# EAGLE board Ion_Pump_Controler_6A (EAGLE 4.11)
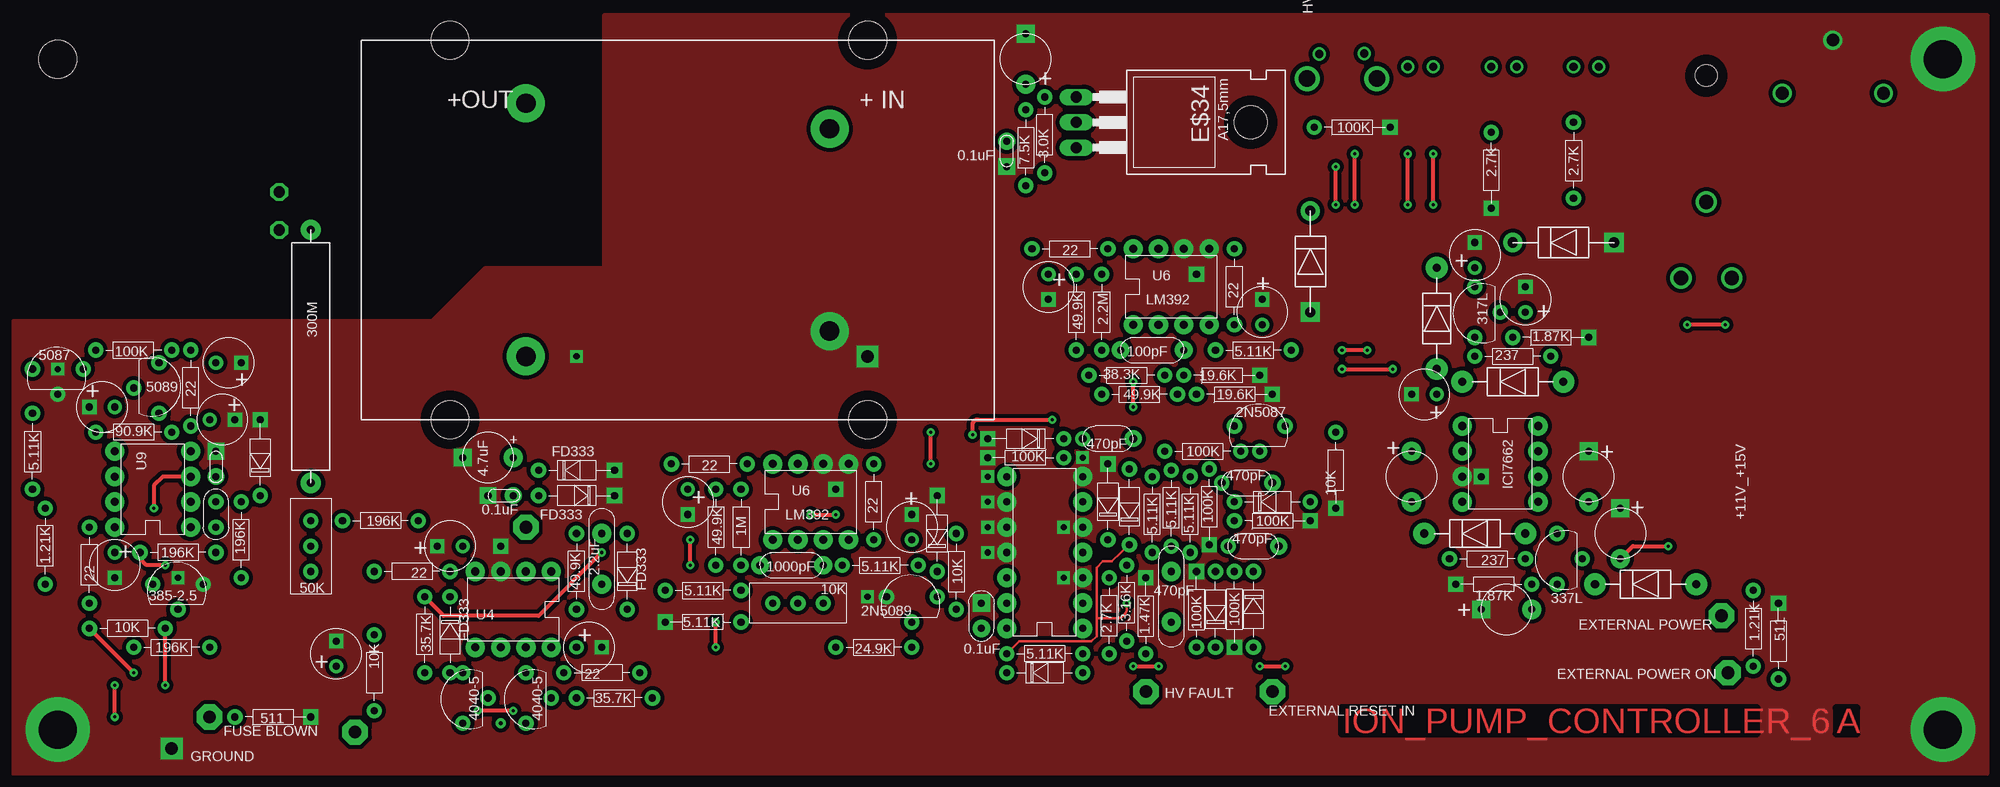
[diagram p0: board, top side]
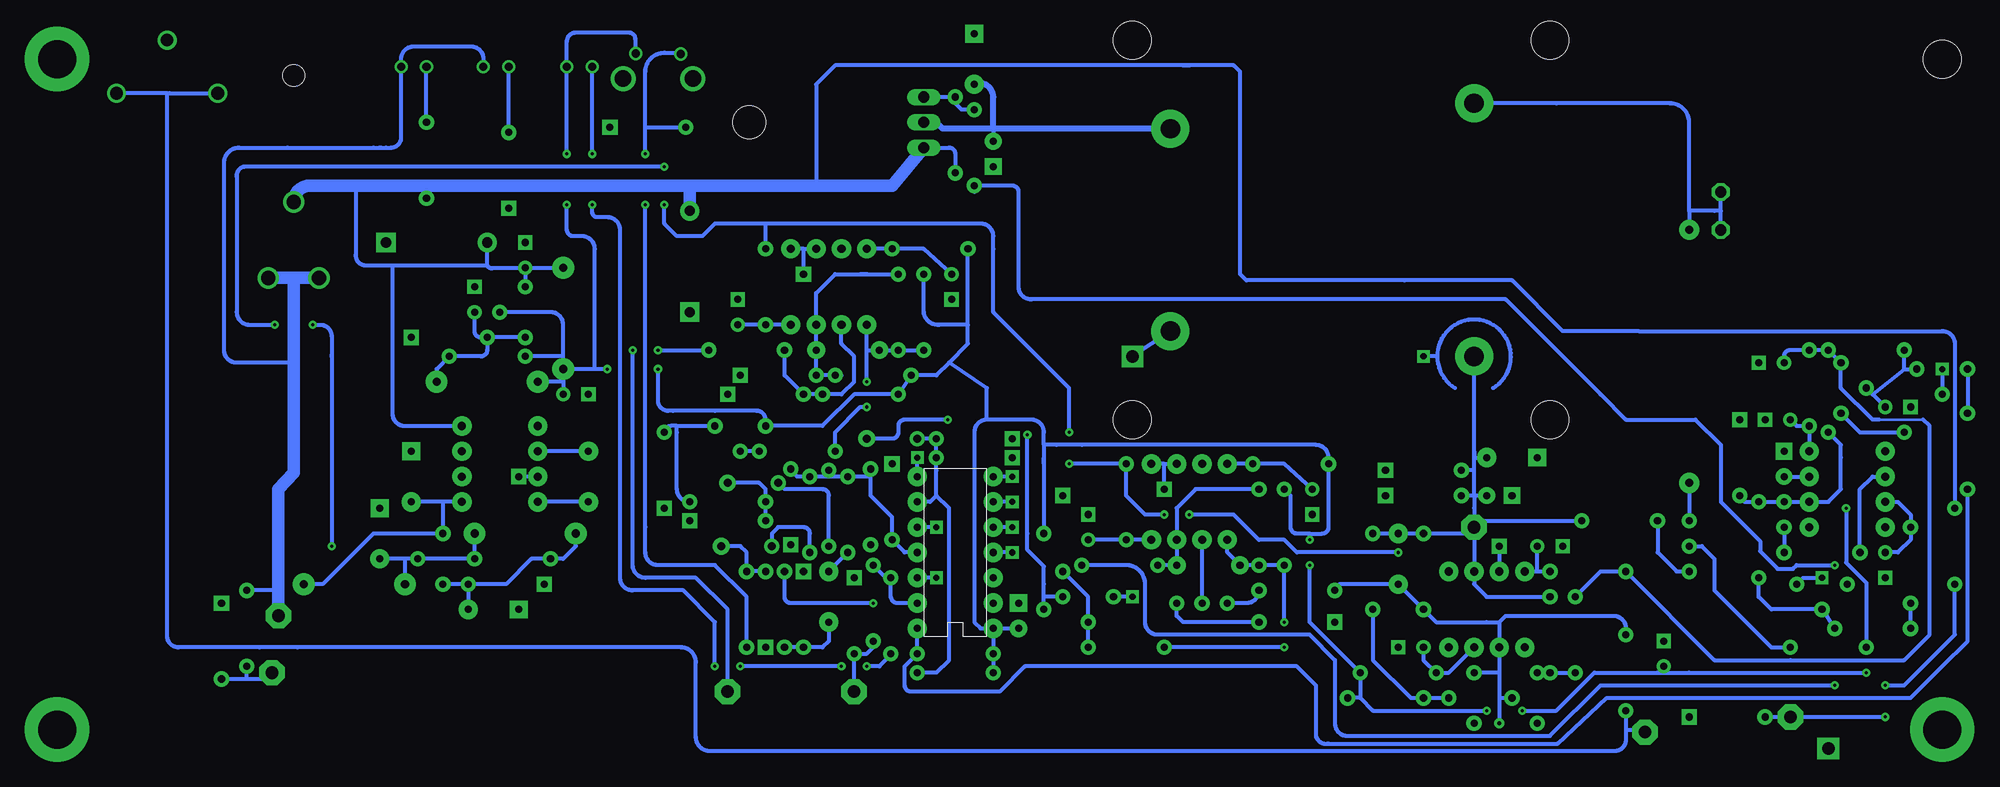
[diagram p1: board, bottom side, seen from below]

No outline drawn. Coordinates in mm, seen from the top.
Copper layers (1*16): Top 0.035mm / dielectric 1.5mm / Bottom 0.035mm
Design rules "default": minimum track width 10mil, minimum drill 24mil, track to track 8mil, track to pad 8mil, pad to pad 8mil, via to via 8mil, smd to smd 8mil, copper to edge 40mil, drill to drill 8mil, minimum pad ring 10mil, minimum via ring 8mil, stop-mask expansion 4mil, vias tented up to drill 0mil, thermal gap 10mil
Holes 3.81 mm at 4.45,-4.45 85.72,-2.54 85.72,-40.64 43.81,-2.54 43.81,-40.64

## Footprints (pad centres in the part's own frame; a part is rotated, then mirrored left to right if it is on the bottom)
E_PAD = drill 1.93 pad 3.81 round: P$1 0,0
PADOC100 = drill 1.27 pad 2.54 octagon: P$1 0,0
PADOCT70 = drill 1.143 pad 1.778 octagon: P$1 0,0
TPOT = drill 0.711 pad 1.524 round: P$2 0,0; P$3 0,2.54; P$4 0,5.08
D3AG = drill 0.711 pad 1.524 round: P$1 0,0 | drill 0.711 pad 1.524 square: P$2 7.62,0
D3KG = drill 0.711 pad 1.524 round: P$1 0,0 | drill 0.711 pad 1.524 square: P$2 7.62,0
TANT2GND = drill 0.711 pad 1.778 square: P$1 0,5.08 | drill 0.711 pad 1.93 round: P$3 0,0
CAP1_GND = drill 0.711 pad 1.676 square: P$1 0,0 | drill 0.711 pad 1.676 round: P$2 2.54,0
GND_L = drill 1.27 pad 2.184 square: P$1 0,0
DIP8 = drill 0.813 pad 1.93 round: P$1 0,0; P$2 2.54,0; P$3 5.08,0; P$4 7.62,0; P$5 7.62,7.62; P$6 5.08,7.62; P$7 2.54,7.62; P$8 0,7.62
R_HV = drill 0.813 pad 2.032 round: P$1 0,0; P$2 25.4,0
R3 = drill 0.711 pad 1.524 round: P$1 0,0; P$2 7.62,0
TANT1GND = drill 0.711 pad 1.422 square: P$1 0,2.54 | drill 0.711 pad 1.422 round: P$2 0,0
CAPMICA2 = drill 0.711 pad 1.93 round: P$1 0,0; P$2 5.08,0
TO92 = drill 0.711 pad 1.524 round: P$1 0,0; P$3 0,5.08; P$4 -2.54,2.54
D3 = drill 0.711 pad 1.524 round: P$1 0,0; P$2 7.62,0
GND = drill 0.711 pad 1.524 square: P$1 0,0
GND_S = drill 0.61 pad 1.27 square: P$1 0,0
TO220 = drill 1.118 long: 1 -2.54,-6.35; 2 0,-6.35; 3 2.54,-6.35 | hole 3.302: 0,11.176
R3G = drill 0.711 pad 1.524 round: P$1 0,0 | drill 0.711 pad 1.524 square: P$2 7.62,0
CAP2-5 = drill 0.711 pad 1.778 round: P$1 0,0; P$2 6.35,0
DIP14 = drill 0.711 pad 1.93 round: P$1 0,0; P$2 2.54,0; P$3 5.08,0; P$4 7.62,0; P$5 7.62,7.62; P$6 5.08,7.62; P$7 2.54,7.62; P$8 0,7.62; P$9 10.16,7.62; P$10 12.7,7.62; P$12 15.24,0; P$13 12.7,0; P$14 10.16,0; P$16 15.24,7.62 | drill 0.406 pad 1.93 round: P$11 15.24,7.62; P$15 15.24,7.62
CAP_1GND = drill 0.711 pad 1.778 round: P$1 0,0 | drill 0.711 pad 1.778 square: P$2 0,2.54
CAP2 = drill 0.813 pad 1.676 round: P$1 0,0 | drill 0.813 pad 1.524 round: P$2 5.08,0
P_B_SWITCH = drill 0.813 round: P$1 2.286,2.54; P$2 -2.235,2.489 | drill 1.676 round: P$3 -3.505,5.004; P$4 3.505,5.004
LED_RTANGL = drill 0.813 round: P$1 -1.27,5.207; P$2 1.27,5.207
JACK = drill 1.27 round: P$1 0,0; P$2 5.08,-5.334; P$3 -5.08,-5.334
CAP1 = drill 0.711 pad 1.524 round: P$1 0,0; P$2 0,2.54
D4AG = drill 1.016 pad 1.93 round: P$1 10.16,0 | drill 1.016 pad 1.93 square: P$2 0,0
D4 = drill 0.813 pad 2.184 round: P$1 0,0; P$2 10.16,0
TANT2 = drill 0.711 pad 1.93 round: P$1 0,-2.54; P$2 0,2.54
PAD_#6 = drill 3.81 pad 6.452 round: P$1 0,0
FUSE_HOLDER_SHORT = drill 1.422 round: P$1 0,0; P$2 2.55,-7.62; P$3 -2.54,-7.63 | hole 2.184: 0,12.7

## Placement (x,y rotation side)
E$1  [E_50]  98.42,-2.54 180 top
E$2  [E_PAD]  81.92,-31.75 180 top
E$3  [E_PAD]  51.44,-34.29 180 top
E$4  [E_PAD]  51.44,-8.89 180 top
E$5  [E_PAD]  81.92,-11.43 180 top
E$6  [PADOC100]  34.29,-72.01 0 top
E$7  [PADOCT70]  26.67,-17.78 0 top
E$8  [PADOCT70]  26.67,-21.59 0 top
E$9  [PADOC100]  51.44,-51.44 0 top
E$10  [TPOT]  29.84,-55.88 0 top
E$11  [D3AG]  52.7,-45.72 0 top
E$12  [D3KG]  52.7,-48.26 0 top
E$13  [TANT2GND]  50.16,-44.45 90 top
E$14  [CAP1_GND]  47.62,-48.26 0 top
E$15  [GND_L]  85.72,-34.29 180 top
E$16  [DIP8]  53.98,-55.88 180 top
E$17  [R_HV]  29.84,-21.59 270 top
E$18  [R3]  12.06,-63.5 0 top
E$19  [R3]  40.64,-50.8 180 top
E$20  [R3]  43.81,-55.88 180 top
E$21  [R3]  62.87,-66.04 180 top
E$22  [TANT1GND]  56.52,-63.5 270 top
E$23  [TANT1GND]  45.09,-53.34 90 top
E$24  [R3]  56.52,-59.69 90 top
E$25  [CAPMICA2]  59.05,-57.15 90 top
E$26  [TO92]  45.09,-66.04 180 top
E$27  [TO92]  51.44,-66.04 180 top
E$28  [R3]  56.52,-68.58 0 top
E$29  [R3]  41.27,-66.04 90 top
E$30  [D3]  43.81,-58.42 270 top
E$31  [D3]  61.59,-59.69 90 top
E$32  [GND]  48.9,-53.34 90 top
E$33  [GND_S]  56.52,-34.29 0 top
E$34  [TO220]  113.03,-10.79 270 top
E$35  [R3]  103.5,-15.88 90 top
E$36  [R3]  101.6,-9.53 270 top
E$37  [R3]  36.2,-62.23 270 top
E$38  [TANT2GND]  101.6,-6.99 0 top
E$39  [R3]  70.48,-47.62 270 top
E$40  [R3]  73.03,-47.62 270 top
E$41  [TPOT]  81.28,-59.05 90 top
E$42  [R3G]  73.03,-60.96 180 top
E$43  [TO92]  92.71,-58.42 90 top
E$44  [R3]  82.55,-63.5 0 top
E$45  [GND_S]  85.72,-58.42 0 top
E$46  [CAP2-5]  74.93,-55.24 0 top
E$47  [CAP1_GND]  99.69,-15.24 90 top
E$48  [D3AG]  92.71,-55.88 90 top
E$49  [R3]  94.61,-52.07 270 top
E$50  [DIP14]  107.31,-61.59 90 top
E$51  [GND_S]  107.31,-44.45 180 top
E$52  [GND_S]  105.41,-56.52 180 top
E$53  [GND_S]  105.41,-51.44 180 top
E$54  [CAP_1GND]  97.16,-61.59 0 top
E$55  [R3]  107.31,-64.14 180 top
E$56  [DIP8]  76.2,-52.7 0 top
E$57  [R3]  109.98,-64.14 90 top
E$58  [R3]  111.76,-62.87 90 top
E$59  [R3G]  113.67,-64.14 90 top
E$60  [R3G]  105.41,-44.45 180 top
E$61  [D3]  99.69,-66.04 0 top
E$62  [D3AG]  105.41,-42.55 180 top
E$63  [R3]  86.36,-52.7 90 top
E$64  [R3]  66.04,-45.09 0 top
E$65  [R3]  65.41,-57.78 0 top
E$66  [CAP2]  112.39,-42.55 180 top
E$67  [GND]  82.55,-47.62 0 top
E$68  [TANT1GND]  90.17,-52.7 0 top
E$69  [TANT1GND]  67.69,-47.62 180 top
E$70  [R3]  83.19,-55.24 0 top
E$71  [D3AG]  109.86,-52.7 90 top
E$72  [D3]  112.01,-53.21 90 top
E$73  [R3]  114.3,-53.98 90 top
E$74  [R3]  116.2,-53.34 90 top
E$75  [R3]  118.11,-53.98 90 top
E$76  [R3G]  120.02,-45.59 270 top
E$77  [CAPMICA2]  116.2,-55.88 270 top
E$78  [R3G]  118.75,-63.5 90 top
E$79  [D3]  120.65,-63.5 90 top
E$80  [CAP2]  127,-53.34 180 top
E$81  [CAP2]  126.36,-46.99 180 top
E$82  [R3G]  122.56,-55.88 270 top
E$83  [GND_S]  97.79,-46.35 0 top
E$84  [D3]  124.46,-55.88 270 top
E$85  [R3G]  122.56,-50.8 0 top
E$86  [D3]  122.56,-48.9 0 top
E$87  [GND_S]  97.79,-48.9 0 top
E$88  [GND_S]  97.79,-51.44 0 top
E$89  [GND_S]  97.79,-53.98 0 top
E$90  [DIP8]  112.39,-31.11 0 top
E$91  [R3]  122.56,-31.11 90 top
E$92  [R3]  102.23,-23.5 0 top
E$93  [TANT1GND]  125.35,-31.11 0 top
E$94  [GND]  118.75,-26.04 0 top
E$95  [TANT1GND]  103.89,-26.04 180 top
E$96  [R3]  120.65,-33.66 0 top
E$97  [CAP2-5]  111.12,-33.66 0 top
E$98  [R3]  106.68,-26.04 270 top
E$99  [R3]  109.22,-26.04 270 top
E$100  [R3]  107.95,-36.2 0 top
E$101  [R3G]  117.47,-36.2 0 top
E$102  [R3G]  118.75,-38.1 0 top
E$103  [R3]  109.22,-38.1 0 top
E$104  [TO92]  127.64,-41.27 90 top
E$105  [R3]  115.57,-43.81 0 top
E$106  [R3G]  132.72,-41.91 270 top
E$107  [P_B_SWITCH]  133.35,-1.4 180 top
E$108  [LED_RTANGL]  141.22,0 180 top
E$109  [LED_RTANGL]  149.61,0 180 top
E$110  [LED_RTANGL]  157.86,0 180 top
E$112  [JACK]  182.63,-2.54 0 top
E$113  [R3]  156.59,-10.79 270 top
E$114  [R3G]  148.34,-11.81 270 top
E$115  [R3G]  130.56,-11.3 0 top
E$116  [TO92]  146.69,-27.3 180 top
E$117  [TO92]  154.94,-52.07 180 top
E$118  [DIP8]  145.41,-41.27 270 top
E$119  [TANT1GND]  146.69,-25.4 0 top
E$120  [TANT1GND]  151.76,-29.84 0 top
E$121  [TANT1GND]  142.88,-38.1 90 top
E$122  [DIP8]  17.78,-51.44 90 top
E$123  [R3]  20.32,-53.98 180 top
E$124  [R3]  7.62,-59.05 90 top
E$125  [R3]  17.78,-41.27 90 top
E$126  [TANT1GND]  10.16,-53.98 180 top
E$127  [TANT1GND]  19.68,-40.64 270 top
E$128  [CAP1]  20.32,-48.9 180 top
E$129  [CAP1_GND]  20.32,-43.81 270 top
E$130  [R3]  15.24,-61.59 180 top
E$131  [R3]  22.86,-56.52 90 top
E$132  [TO92]  19.05,-57.15 90 top
E$133  [GND_S]  16.51,-56.52 180 top
E$134  [TO92]  14.61,-40.01 0 top
E$135  [R3]  8.26,-33.66 0 top
E$136  [R3]  15.88,-41.91 180 top
E$137  [D3AG]  24.77,-48.26 90 top
E$138  [TANT1GND]  10.16,-39.37 90 top
E$139  [TO92]  6.99,-35.56 90 top
E$140  [GND_S]  4.45,-35.56 180 top
E$141  [R3]  1.91,-40.01 270 top
E$142  [R3]  146.69,-34.29 0 top
E$143  [R3G]  150.5,-32.38 0 top
E$144  [D4AG]  160.66,-22.86 180 top
E$145  [D4]  142.88,-25.4 270 top
E$146  [D4]  145.41,-36.83 0 top
E$147  [GND]  147.32,-46.35 0 top
E$148  [TANT2]  140.34,-46.35 0 top
E$149  [TANT2GND]  158.12,-48.9 0 top
E$150  [R3]  144.15,-54.61 0 top
E$151  [R3G]  152.4,-57.15 180 top
E$152  [TANT2GND]  161.29,-54.61 0 top
E$153  [TANT2GND]  152.4,-59.69 90 top
E$154  [D4]  141.6,-52.07 0 top
E$155  [D4]  158.75,-57.15 0 top
E$156  [D4AG]  130.18,-29.84 90 top
E$157  [TANT1GND]  32.38,-65.41 0 top
E$158  [PADOC100]  126.36,-67.94 0 top
E$159  [TANT1GND]  20.32,-34.92 270 top
E$160  [R3]  3.17,-57.15 90 top
E$161  [R3]  174.62,-57.78 270 top
E$162  [R3G]  177.16,-66.67 90 top
E$163  [PADOC100]  172.09,-66.04 0 top
E$164  [PAD_#6]  193.68,-4.45 0 top
E$165  [PAD_#6]  193.68,-71.75 0 top
E$166  [PADOC100]  19.68,-70.48 0 top
E$167  [GND_L]  15.88,-73.66 0 top
E$168  [R3G]  22.23,-70.48 0 top
E$169  [PADOC100]  171.45,-60.33 0 top
E$170  [PADOC100]  113.67,-67.94 0 top
E$171  [PAD_#6]  4.45,-71.75 0 top
E$172  [FUSE_HOLDER_SHORT]  169.93,-18.8 0 top

## Library data of the parts
E$1-E$33 E$35-E$110 E$112-E$172 = AJ1
E$34 = transistor

## Nets
2.5R: E$70.P$2 E$130.P$1 E$131.P$1 E$132.P$4
+V: E$21.P$1 E$28.P$2 E$39.P$1 E$49.P$1 E$50.P$8 E$54.P$1 E$55.P$2 E$61.P$1 E$64.P$1 E$72.P$1 E$79.P$2 E$92.P$1 E$98.P$1 E$100.P$1 E$103.P$1 E$104.P$3 E$116.P$4 E$121.P$2 E$124.P$1 E$130.P$2 E$142.P$1 E$145.P$2 E$146.P$1 E$157.P$2
-V: E$20.P$2 E$29.P$2 E$63.P$2 E$125.P$2 E$134.P$3 E$135.P$2 E$159.P$2
FEEDBACK: E$36.P$2 E$122.P$6 E$123.P$2
GND: E$2.P$1 E$11.P$2 E$12.P$2 E$13.P$1 E$14.P$1 E$15.P$1 E$16.P$3 E$22.P$1 E$23.P$1 E$32.P$1 E$33.P$1 E$38.P$1 E$42.P$2 E$43.P$3 E$45.P$1 E$47.P$1 E$48.P$2 E$50.P$3 E$50.P$5 E$50.P$9 E$50.P$10 E$50.P$11 E$50.P$12 E$50.P$14 E$51.P$1 E$52.P$1 E$53.P$1 E$54.P$2 E$56.P$5 E$56.P$6 E$59.P$2 E$60.P$2 E$62.P$2 E$67.P$1 E$68.P$1 E$69.P$1 E$71.P$2 E$76.P$2 E$78.P$2 E$82.P$2 E$83.P$1 E$85.P$2 E$87.P$1 E$88.P$1 E$89.P$1 E$90.P$5 E$90.P$6 E$93.P$1 E$94.P$1 E$95.P$1 E$101.P$2 E$102.P$2 E$106.P$2 E$112.P$1 E$114.P$2 E$115.P$2 E$118.P$3 E$119.P$1 E$120.P$1 E$121.P$1 E$126.P$1 E$127.P$1 E$129.P$1 E$132.P$1 E$133.P$1 E$137.P$2 E$138.P$1 E$139.P$4 E$140.P$1 E$143.P$2 E$144.P$2 E$147.P$1 E$149.P$1 E$151.P$2 E$152.P$1 E$153.P$1 E$156.P$2 E$157.P$1 E$159.P$1 E$162.P$2 E$164.P$1 E$165.P$1 E$167.P$1 E$168.P$2 E$171.P$1
S$1: E$4.P$1 E$17.P$1
S$2: E$10.P$4 E$17.P$2
S$3: E$10.P$3 E$18.P$2
S$4: E$139.P$3 E$141.P$1
S$5: E$123.P$1 E$128.P$2
S$6: E$39.P$2 E$40.P$2 E$46.P$1 E$56.P$1
S$7: E$84.P$2 E$115.P$1
S$9: E$11.P$1 E$12.P$1 E$13.P$3 E$14.P$2 E$16.P$2 E$19.P$1 E$24.P$2 E$25.P$2 E$30.P$1 E$31.P$2
S$10: E$16.P$4 E$20.P$1 E$23.P$2
S$11: E$16.P$7 E$21.P$2 E$22.P$2
S$12: E$10.P$2 E$19.P$2
S$13: E$26.P$1 E$29.P$1
S$14: E$34.1 E$35.P$2 E$36.P$1
S$15: E$122.P$3 E$129.P$2
S$16: E$122.P$2 E$128.P$1 E$131.P$2 E$136.P$1 E$137.P$1
S$17: E$27.P$4 E$28.P$1 E$31.P$1
S$19: E$5.P$1 E$38.P$3 E$47.P$2
S$20: E$41.P$3 E$56.P$2
S$21: E$41.P$4 E$65.P$2
S$22: E$41.P$2 E$42.P$1
S$23: E$90.P$2 E$96.P$1 E$102.P$1 E$103.P$2
S$24: E$56.P$4 E$68.P$2
S$26: E$43.P$1
S$27: E$91.P$1
S$28: E$66.P$1
S$29: E$86.P$2 E$104.P$1 E$106.P$1
S$30: E$90.P$8 E$92.P$2 E$95.P$2
S$31: E$90.P$3 E$99.P$1
S$32: E$50.P$1 E$55.P$1 E$141.P$2
S$33: E$50.P$2 E$57.P$2 E$58.P$2
S$34: E$49.P$2
S$35: E$81.P$1 E$85.P$1 E$86.P$1
S$36: E$50.P$13 E$61.P$2 E$62.P$1 E$66.P$2
S$37: E$74.P$1 E$81.P$2
S$38: E$40.P$1 E$56.P$3 E$70.P$1
S$39: E$90.P$4
S$40: E$80.P$1 E$82.P$1 E$84.P$1
S$41: E$56.P$8 E$64.P$2 E$69.P$2
S$42: E$163.P$1
S$43: E$50.P$4 E$71.P$1 E$72.P$2 E$73.P$2 E$74.P$2 E$75.P$2
S$44: E$73.P$1 E$77.P$1
S$45: E$77.P$2 E$78.P$1 E$79.P$1
S$46: E$16.P$6 E$24.P$1 E$25.P$1 E$26.P$4 E$27.P$1 E$37.P$1 E$65.P$1
S$47: E$101.P$1
S$48: E$75.P$1 E$80.P$2
S$49: E$43.P$4 E$44.P$2 E$48.P$1
S$51: E$166.P$1 E$168.P$1
S$52: E$104.P$4 E$105.P$2
S$53: E$90.P$1 E$97.P$1 E$98.P$2 E$99.P$2 E$105.P$1
S$54: E$96.P$2
S$56: E$108.P$2
S$57: E$59.P$1
S$58: E$172.P$1
S$59: E$109.P$2
S$60: E$110.P$2 E$113.P$1
S$61: E$113.P$2
S$62: E$117.P$4 E$150.P$2 E$152.P$3 E$154.P$2
S$63: E$91.P$2
S$64: E$116.P$3 E$120.P$2 E$142.P$2 E$143.P$1 E$146.P$2
S$66: E$118.P$4 E$148.P$1
S$67: E$118.P$2 E$148.P$2
S$68: E$117.P$3 E$150.P$1 E$153.P$3 E$154.P$1
S$69: E$117.P$1 E$118.P$5 E$149.P$3 E$155.P$2
S$70: E$37.P$2 E$112.P$2 E$112.P$3
S$72: E$34.3 E$35.P$1 E$116.P$1 E$118.P$8 E$144.P$1 E$145.P$1 E$156.P$1 E$160.P$2
S$76: E$122.P$7 E$124.P$2 E$126.P$2
S$81: E$122.P$4 E$125.P$1 E$127.P$2
S$84: E$134.P$1 E$136.P$2
S$86: E$134.P$4 E$135.P$1 E$138.P$2 E$139.P$1

## Tracks (layer width: path | path; a pad name or v marks a point on that pad's centre or on a via)
2.5R  (via drill 0.3 pad 0.81)
  Top 0.406: v15.24,-67.31 E$130.P$1
  Bottom 0.406: E$131.P$1 22.86,-58.42 21.59,-59.69 E$132.P$4 E$130.P$1 | v15.24,-67.31 38.73,-67.31 43.81,-72.39 64.14,-72.39 arc90 65.41,-71.12 65.41,-69.85 65.41,-67.94 65.41,-64.77 67.94,-62.23 83.19,-62.23 arc90 84.45,-60.96 84.45,-57.15 arc-90 86.36,-55.24 E$70.P$2
+V  (via drill 0.3 pad 0.81)
  Top 0.254: E$72.P$1 110.24,-54.86 109.35,-54.86 108.71,-55.5 | 108.71,-55.5 108.71,-55.63 | v111.76,-59.05 111.76,-59.56 arc-90 110.74,-60.58 108.71,-60.58 | 108.71,-55.5 108.71,-56.64 108.71,-60.58 | 108.71,-60.58 108.71,-62.36 108.2,-62.87 107.31,-62.87 100.97,-62.87 E$55.P$2
  Top 0.406: v142.49,-19.05 v142.49,-13.97 | v133.35,-35.56 v138.43,-35.56 | v12.06,-66.04 E$130.P$2 | v67.94,-55.24 v67.94,-52.7 | v50.16,-69.85 v46.61,-69.85
  Bottom 0.406: v142.49,-19.05 142.49,-21.59 arc-90 141.86,-22.23 141.1,-22.23 140.97,-22.23 arc90 139.7,-23.5 139.7,-35.56 | 142.88,-36.83 E$121.P$2 | 142.88,-36.83 E$146.P$1 | E$79.P$2 120.65,-58.42 arc-90 120.02,-59.05 v111.76,-59.05 | E$145.P$2 142.88,-36.83 | E$145.P$2 142.88,-34.92 | 139.7,-35.56 E$145.P$2 | v138.43,-35.56 139.7,-35.56 | v133.35,-35.56 133.35,-38.73 arc-90 132.33,-39.75 131.83,-39.75 127.64,-39.75 123.44,-39.75 arc90 122.56,-40.64 E$104.P$3 116.84,-41.27 113.67,-38.1 E$103.P$1 E$100.P$1 105.41,-36.2 104.14,-34.92 | E$61.P$1 E$55.P$2 E$50.P$8 | E$98.P$1 106.68,-29.72 arc-90 105.28,-31.11 105.16,-31.11 102.23,-31.11 | E$50.P$8 E$54.P$1 | E$50.P$8 100.97,-61.59 101.6,-60.96 101.6,-54.61 101.6,-46.99 101.6,-42.55 101.6,-41.91 arc90 100.33,-40.64 | 102.23,-31.11 E$92.P$1 | 102.23,-31.11 102.23,-33.02 104.14,-34.92 | 104.14,-34.92 100.33,-37.47 100.33,-40.64 | 100.33,-40.64 95.89,-40.64 arc90 94.61,-41.91 94.61,-43.18 | 94.61,-45.09 94.61,-44.45 | 94.61,-45.09 E$49.P$1 | 94.61,-43.18 94.61,-45.09 | 94.61,-43.18 93.34,-43.18 90.81,-43.18 67.31,-43.18 arc90 66.04,-44.45 E$64.P$1 66.04,-50.8 66.04,-51.44 arc90 66.67,-52.07 67.94,-52.07 | E$130.P$2 E$124.P$1 | E$39.P$1 69.85,-48.26 69.85,-50.8 69.85,-51.44 arc-90 69.22,-52.07 68.58,-52.07 67.94,-52.07 | v12.06,-66.04 29.84,-66.04 32.38,-66.04 | 32.38,-66.04 E$157.P$2 | 32.38,-66.04 33.02,-66.04 39.37,-66.04 43.18,-69.85 v46.61,-69.85 | v67.94,-52.7 67.94,-52.07 | v50.16,-69.85 61.59,-69.85 62.87,-68.58 | v67.94,-55.24 67.94,-60.96 66.04,-62.87 E$21.P$1 62.87,-68.58 | 62.87,-68.58 E$28.P$2 | E$145.P$2 142.88,-34.29 | 142.88,-34.29 142.88,-31.11 arc-90 144.15,-29.84 E$116.P$4
  Bottom 0.406: 142.88,-34.29 E$142.P$1
-V  (via drill 0.3 pad 0.81)
  Top 0.406: v171.83,-31.11 v168.02,-31.11 | v132.72,-19.05 v132.72,-15.24 | v92.08,-45.09 v92.08,-41.91 | v80.01,-50.16 v82.55,-50.16 | E$29.P$2 43.18,-60.33 52.7,-60.33 v59.05,-53.98
  Bottom 0.254: 6.35,-40.64 10.79,-40.64
  Bottom 0.406: 166.12,-34.16 166.12,-34.29 | 166.12,-34.16 166.12,-53.34 | 166.12,-34.16 166.12,-32.26 arc-90 167.26,-31.11 v168.02,-31.11 | v171.83,-31.11 174.24,-31.11 174.37,-31.11 arc90 175.64,-29.84 175.64,-16.26 175.64,-16.13 arc90 174.75,-15.24 170.56,-15.24 v132.72,-15.24 | v132.72,-19.05 132.72,-20.95 131.44,-22.23 128.91,-22.23 127.64,-20.95 121.28,-20.95 102.23,-20.95 100.97,-20.95 arc90 99.69,-22.23 99.69,-23.5 99.69,-29.84 92.08,-37.47 v92.08,-41.91 | E$159.P$2 20.32,-34.29 arc90 19.68,-33.66 E$125.P$2 E$135.P$2 E$134.P$3 14.61,-37.47 11.43,-40.64 10.79,-40.64 | 6.35,-40.64 5.71,-41.27 5.71,-62.23 8.26,-64.77 19.68,-64.77 27.3,-64.77 E$20.P$2 38.73,-55.88 E$29.P$2 | v92.08,-45.09 E$63.P$2 86.36,-48.26 84.45,-50.16 v82.55,-50.16 | v80.01,-50.16 75.56,-50.16 73.03,-52.7 70.48,-52.7 69.22,-53.98 v59.05,-53.98
FEEDBACK  (via drill 0.3 pad 0.81)
  Top 0.406: E$123.P$2 12.7,-54.61 13.34,-55.24 v15.24,-55.24
  Bottom 0.406: E$122.P$6 11.43,-46.35 12.7,-47.62 E$123.P$2 | v15.24,-55.24 19.05,-55.24 19.43,-55.63 20.95,-55.63 22.73,-53.85 22.73,-52.83 26.67,-48.9 26.67,-43.18 29.21,-40.64 36.2,-40.64 38.73,-38.1 48.26,-28.57 95.89,-28.57 arc90 97.16,-27.3 97.16,-20.32 97.16,-17.78 arc-90 97.79,-17.14 E$36.P$2 101.6,-17.78
GND
  Bottom 0.406: E$118.P$3 E$147.P$1 | E$67.P$1 82.55,-45.09 | 82.55,-45.09 E$56.P$6 | E$45.P$1 E$43.P$3 | 82.55,-45.09 E$56.P$5 | E$83.P$1 E$50.P$11 | E$87.P$1 E$50.P$10 | E$88.P$1 E$50.P$9 | E$89.P$1 E$50.P$5 | E$52.P$1 E$50.P$3 | E$53.P$1 E$50.P$14 | E$50.P$12 E$51.P$1 | 118.75,-23.5 E$90.P$6 | 118.75,-23.5 E$90.P$5 | E$94.P$1 118.75,-23.5 | E$2.P$1 E$15.P$1 | 55.24,-34.29 E$33.P$1 | E$133.P$1 18.41,-56.52 E$132.P$1 | E$140.P$1 E$139.P$4 | E$32.P$1 E$16.P$3
  pour Top (isolate 0.406, no thermals): 0,-30.73 42.04,-30.73 47.37,-25.4 59.31,-25.4 59.31,0 198.12,0 198.12,-76.2 0,-76.2 0,-75.95
S$1
  Bottom 0.406: E$4.P$1 43.18,-8.89 31.75,-8.89 arc90 29.84,-10.79 29.84,-13.34 29.84,-19.68 | 29.84,-19.68 27.3,-19.68 26.67,-19.68 | 26.67,-19.68 26.67,-17.78 | 26.67,-21.59 26.67,-19.68 | 29.84,-19.68 E$17.P$1
S$2
  Bottom 0.406: E$17.P$2 E$10.P$4
S$3
  Bottom 0.406: E$10.P$3 28.57,-53.34 27.3,-54.61 27.3,-57.78 21.59,-63.5 E$18.P$2
S$4
  Bottom 0.406: E$139.P$3 E$141.P$1
S$5
  Bottom 0.406: E$128.P$2 E$123.P$1
S$6  (via drill 0.3 pad 0.81)
  Top 0.406: v70.48,-63.5 v70.48,-60.96
  Bottom 0.406: v70.48,-63.5 82.55,-63.5 | E$56.P$1 76.2,-53.98 E$46.P$1 E$40.P$2 E$39.P$2 v70.48,-60.96
S$7  (via drill 0.3 pad 0.81)
  Top 0.406: v134.62,-19.05 v134.62,-13.97
  Bottom 0.406: v134.62,-19.05 134.62,-51.44 134.62,-53.98 arc-90 133.35,-55.24 127.64,-55.24 124.46,-58.42 124.46,-59.05 124.46,-59.69 E$84.P$2 | v134.62,-13.97 134.62,-11.3 | 134.62,-11.3 134.62,-5.71 arc90 132.72,-3.81 130.94,-3.81 | 134.62,-11.3 E$115.P$1
S$8
  Bottom 0.406: 49.53,-37.47 arc-298 53.34,-37.47
S$9
  Bottom 0.406: 51.44,-45.72 E$11.P$1 | 51.44,-43.81 51.44,-44.45 | 51.44,-45.72 51.44,-43.81 | 51.44,-44.45 E$13.P$3 | 51.44,-48.26 51.44,-45.72 | 51.44,-45.72 51.44,-44.45 | 51.44,-48.26 E$12.P$1 | E$14.P$2 51.44,-48.26 | E$31.P$2 E$25.P$2 E$24.P$2 51.44,-52.07 | 51.44,-48.26 51.44,-49.53 51.44,-50.8 | 51.44,-50.8 E$19.P$1 | 51.44,-50.8 51.44,-52.07 | 51.44,-52.07 E$16.P$2 51.44,-57.15 50.16,-58.42 E$30.P$1 | 51.44,-43.81 51.44,-34.29
S$10
  Bottom 0.406: 45.09,-55.88 E$20.P$1 | 45.09,-55.88 E$23.P$2 | E$16.P$4 45.09,-55.88
S$11
  Bottom 0.406: E$22.P$2 56.52,-64.77 E$21.P$2 53.98,-66.04 E$16.P$7
S$12
  Bottom 0.406: E$19.P$2 33.02,-53.98 31.11,-55.88 E$10.P$2
S$13
  Bottom 0.406: E$26.P$1 E$29.P$1
S$14
  Bottom 0.406: E$34.1 E$35.P$2 103.5,-8.89 102.87,-9.53 E$36.P$1
S$15  (via drill 0.3 pad 0.81)
  Top 0.406: v14.1,-49.53 14.1,-47.24 14.99,-46.35 E$122.P$3
  Bottom 0.406: 12.06,-62.87 12.06,-57.02 14.1,-54.99 v14.1,-49.53 | E$129.P$2 E$122.P$3
S$16
  Bottom 0.406: E$136.P$1 14.61,-43.18 14.61,-44.45 14.61,-47.62 15.88,-48.9 16.51,-48.9 E$122.P$2 E$128.P$1 E$131.P$2 24.13,-48.9 arc90 E$137.P$1
S$17
  Bottom 0.406: E$27.P$4 E$28.P$1 57.78,-68.58 61.59,-64.77 E$31.P$1
S$18
  Bottom 0.406: 135.64,-3.94 135.64,-2.41 arc-90 136.27,-1.78 136.4,-1.78 141.6,-1.78 arc-90 142.49,-2.67 142.49,-5.08 142.49,-5.21 142.49,-13.97
S$19
  Bottom 0.406: 98.42,-11.43 99.69,-11.43 | 99.69,-11.43 101.6,-11.43 | 99.69,-11.43 E$47.P$2
  Bottom 0.61: 106.68,-10.79 105.41,-10.79 104.78,-11.43 101.6,-11.43 99.69,-11.43 | 99.69,-11.43 99.06,-11.43 98.42,-11.43 E$5.P$1 | 99.69,-11.43 99.69,-8.26 arc-113 E$38.P$3
S$20
  Bottom 0.406: E$41.P$3 E$56.P$2
S$21
  Bottom 0.406: E$41.P$4 74.93,-59.05 74.3,-59.05 arc-90 E$65.P$2
S$22
  Bottom 0.406: E$41.P$2 81.28,-60.33 80.64,-60.96 73.66,-60.96 E$42.P$1
S$23
  Bottom 0.406: E$96.P$1 120.65,-34.92 120.65,-36.2 E$102.P$1 E$103.P$2 114.94,-38.1 113.67,-36.83 113.67,-34.29 114.94,-33.02 E$90.P$2
S$24
  Bottom 0.406: E$68.P$2 85.72,-52.7 E$56.P$4
S$26
  Bottom 0.406: E$43.P$1 94.61,-58.42
S$27
  Bottom 0.406: E$91.P$1 125.35,-31.11
S$28
  Bottom 0.406: E$66.P$1 111.12,-42.55 109.86,-42.55 arc-90 109.22,-41.91 109.22,-41.27 arc90 108.58,-40.64 104.14,-40.64
S$29
  Bottom 0.406: E$86.P$2 arc90 131.44,-47.62 131.44,-41.91 131.44,-41.27 | E$106.P$1 arc90 132.08,-41.27 131.44,-41.27 | 131.44,-41.27 E$104.P$1
S$30
  Bottom 0.406: E$90.P$8 E$92.P$2 106.68,-23.5 E$95.P$2
S$31
  Bottom 0.406: 112.39,-26.04 113.03,-26.04 | 112.39,-26.04 E$99.P$1 | 112.39,-26.04 115.57,-26.04 117.47,-27.94 E$90.P$3 117.47,-33.66 117.47,-36.2
S$32
  Bottom 0.406: E$141.P$2 1.91,-62.87 4.45,-65.41 7.62,-68.58 38.1,-68.58 43.05,-73.15 66.04,-73.15 arc90 67.31,-72.39 67.31,-71.75 67.31,-67.31 69.22,-65.41 96.52,-65.41 99.06,-67.94 107.31,-67.94 107.95,-67.94 arc90 108.58,-67.31 108.58,-65.41 E$55.P$1 E$50.P$1
S$33
  Bottom 0.406: E$50.P$2 109.22,-59.05 arc90 109.98,-58.42 E$57.P$2 110.49,-56.52 E$58.P$2
S$34
  Bottom 0.406: 96.27,-42.16 96.27,-52.07 96.27,-53.72 94.61,-55.37 94.61,-57.15 E$49.P$2 94.61,-59.05
S$35
  Bottom 0.406: E$85.P$1 E$86.P$1 122.56,-47.62 123.19,-46.99 E$81.P$1
S$36
  Bottom 0.406: E$61.P$2 105.41,-66.04 104.14,-64.77 104.14,-49.53 105.41,-48.26 | E$50.P$13 106.05,-48.9 105.41,-48.26 | 105.41,-48.26 105.41,-45.72 105.41,-44.45 E$62.P$1 E$66.P$2
S$37
  Bottom 0.406: E$74.P$1 116.2,-48.26 arc-90 116.84,-47.62 120.65,-47.62 E$81.P$2
S$38
  Bottom 0.406: E$70.P$1 81.28,-55.24 E$56.P$3 81.28,-49.53 79.38,-47.62 76.2,-47.62 | E$40.P$1 76.2,-47.62 | 76.2,-47.62 76.83,-47.62
S$39
  Bottom 0.406: E$90.P$4 121.92,-31.11
S$40
  Bottom 0.406: E$82.P$1 E$84.P$1 124.46,-53.98 125.09,-53.34 E$80.P$1
S$41
  Bottom 0.406: E$56.P$8 E$64.P$2 70.48,-45.09 E$69.P$2
S$42
  Bottom 0.406: 174.62,-66.67 174.62,-65.41 | 174.62,-66.67 177.16,-66.67 | 174.62,-66.67 172.72,-66.67 arc-90 E$163.P$1
S$43
  Bottom 0.406: 116.2,-46.35 E$75.P$2 119.38,-46.35 120.02,-45.72 | 116.2,-46.35 E$73.P$2 112.01,-46.35 | 116.2,-46.35 E$74.P$2 | 112.01,-46.35 E$72.P$2 | 112.01,-46.35 112.01,-48.26 109.86,-50.42 E$71.P$1 108.58,-53.98 E$50.P$4
S$44
  Bottom 0.406: E$77.P$1 E$73.P$1
S$45
  Bottom 0.406: E$77.P$2 116.2,-62.87 116.84,-63.5 E$78.P$1 E$79.P$1
S$46  (via drill 0.41 pad 1.02)
  Bottom 0.406: 48.9,-68.58 E$26.P$4 | 48.9,-68.58 v48.9,-71.12 | 48.9,-66.04 48.9,-68.58 | 48.9,-66.04 E$27.P$1 | 48.9,-66.04 E$16.P$6 48.9,-60.96 | 48.9,-60.96 50.16,-60.96 55.24,-60.96 E$24.P$1 E$25.P$1 64.77,-57.15 arc-90 E$65.P$1 | 48.9,-60.96 48.26,-60.33 37.47,-60.33 arc90 36.2,-61.59 E$37.P$1
S$47
  Bottom 0.406: 114.94,-36.2 E$101.P$1
S$48
  Bottom 0.406: E$80.P$2 121.92,-52.07 121.28,-51.44 118.75,-51.44 arc90 118.11,-52.07 E$75.P$1
S$49
  Bottom 0.406: E$48.P$1 90.17,-58.42 E$43.P$4 90.17,-62.23 E$44.P$2
S$50
  Bottom 0.406: 150.88,-5.08 150.88,-4.45 arc-90 152.15,-3.17 157.86,-3.17 arc-90 159.13,-4.45 159.13,-5.08 159.13,-12.32 arc90 160.15,-13.34 161.16,-13.34 | 161.16,-13.34 160.66,-13.34 | 161.16,-13.34 161.29,-13.34 161.93,-13.34 170.56,-13.34 175.39,-13.34 arc-90 176.91,-14.86 176.91,-15.49 176.91,-33.66 arc-90 175.64,-34.92 169.93,-34.92 | 171.45,-57.78 174.62,-57.78
  Bottom 1.27: 169.93,-26.42 169.93,-34.92 169.93,-45.97 171.45,-47.62 171.45,-57.78 171.45,-59.69
S$51  (via drill 0.3 pad 0.81)
  Top 0.406: v10.16,-70.48 v10.16,-67.31
  Bottom 0.406: 3.17,-57.15 3.17,-62.23 8.26,-67.31 v10.16,-67.31 | E$168.P$1 E$166.P$1 v10.16,-70.48
S$52
  Bottom 0.406: E$105.P$2 E$104.P$4
S$53  (via drill 0.3 pad 0.81)
  Top 0.406: v112.39,-39.37 v112.39,-36.83
  Bottom 0.406: v112.39,-39.37 113.03,-39.37 115.57,-41.91 E$105.P$1 | 112.39,-33.66 E$90.P$1 | 112.39,-33.66 E$97.P$1 E$99.P$2 E$98.P$2 | v112.39,-36.83 112.39,-33.66
S$54  (via drill 0.3 pad 0.81)
  Top 0.406: v135.89,-33.66 v133.35,-33.66
  Bottom 0.406: v133.35,-33.66 E$96.P$2 | v135.89,-33.66 135.89,-55.24 arc-90 134.62,-56.52 129.54,-56.52 126.36,-59.69 126.36,-60.33 126.36,-68.58
S$55  (via drill 0.3 pad 0.81)
  Top 0.406: v125.09,-65.41 v127.64,-65.41 | v112.39,-65.41 v114.94,-65.41 | v139.95,-19.05 v139.95,-13.97
  Bottom 0.406: v127.64,-65.41 127.64,-60.96 130.81,-57.78 135.89,-57.78 arc90 137.16,-56.52 137.16,-33.66 137.16,-21.59 arc-90 138.43,-20.32 139.45,-20.32 arc90 139.95,-19.81 v139.95,-19.05 | v114.94,-65.41 v125.09,-65.41 | v112.39,-65.41 111.12,-65.41 109.86,-64.14
S$56
  Bottom 0.406: 139.95,-13.97 E$108.P$2
S$57
  Bottom 0.406: 111.76,-63.5 112.39,-64.14 E$59.P$1 113.67,-67.31
S$58
  Bottom 1.27: E$172.P$1 arc90 168.28,-17.14 167.51,-17.14
S$59
  Bottom 0.406: 148.34,-11.81 E$109.P$2
S$60
  Bottom 0.406: E$113.P$1 E$110.P$2
S$61
  Bottom 0.406: E$113.P$2 156.59,-17.27
S$62  (via drill 0.3 pad 0.81)
  Top 0.406: v166.12,-53.34 162.56,-53.34 E$152.P$3
  Bottom 0.406: 158.75,-54.61 E$152.P$3 | 158.75,-54.61 158.75,-57.15 | 158.75,-54.61 E$117.P$4 E$150.P$2 E$154.P$2
S$63
  Bottom 0.406: E$91.P$2 122.56,-20.95
S$64
  Bottom 0.406: E$120.P$2 151.76,-31.75 arc-90 151.13,-32.38 E$143.P$1 | E$116.P$3 E$143.P$1 | E$146.P$2 155.57,-35.56 E$142.P$2 151.13,-34.29 arc-90 150.5,-33.66 E$143.P$1
S$66
  Bottom 0.406: E$148.P$1 E$118.P$4
S$67
  Bottom 0.406: E$148.P$2 E$118.P$2
S$68
  Bottom 0.406: E$154.P$1 141.6,-53.34 142.88,-54.61 E$150.P$1 146.05,-54.61 148.59,-57.15 152.4,-57.15 | 152.4,-57.15 E$117.P$3 | 152.4,-57.15 E$153.P$3
S$69
  Bottom 0.406: E$155.P$2 167,-57.15 161.93,-52.07 160.66,-52.07 E$117.P$1 154.94,-48.9 | E$118.P$5 154.94,-48.9 | 154.94,-48.9 E$149.P$3
S$70
  Bottom 0.406: 182.63,-7.87 182.37,-7.87 E$112.P$3 | 182.63,-7.87 E$112.P$2 | 182.63,-7.87 182.63,-62.36 arc-90 181.48,-63.5 173.35,-63.5 169.54,-63.5 131.06,-63.5 arc90 129.54,-65.02 129.54,-72.52 arc-90 128.14,-73.91 43.05,-73.91 37.47,-73.91 37.34,-73.91 arc-90 36.2,-72.77 36.2,-71.75 | E$37.P$2 36.2,-71.75 | 36.2,-71.75 34.29,-71.75
S$71
  Bottom 1.27: 167.39,-26.42 172.47,-26.42
S$72
  Bottom 0.406: 146.69,-25.4 E$116.P$1 | 146.69,-25.4 E$145.P$1 | 146.69,-25.4 149.22,-25.4 149.86,-25.4 arc90 150.5,-25.15 | E$118.P$8 158.75,-41.27 arc90 160.02,-40.01 160.02,-25.15 | 150.5,-25.15 E$144.P$1 | 160.02,-25.15 150.5,-25.15 | 160.02,-25.15 162.05,-25.15 162.69,-25.15 arc90 163.7,-24.13 163.7,-17.14 | E$35.P$1 103.5,-13.97 arc-90 104.14,-13.34 E$34.3 | 117.47,-17.14 117.47,-6.99 115.57,-5.08 80.64,-5.08 | 80.64,-5.08 80.01,-5.08 | 80.64,-5.08 75.56,-5.08 74.93,-5.71 74.93,-26.04 74.3,-26.67 58.42,-26.67 47.62,-26.67 42.55,-31.75 34.92,-31.75 4.45,-31.75 arc90 3.17,-33.02 3.17,-41.91 E$160.P$2
  Bottom 1.27: 167.39,-17.14 163.7,-17.14 157.48,-17.14 130.18,-17.14 | 130.18,-17.14 E$156.P$1 | 130.18,-17.14 127,-17.14 126.36,-17.14 117.47,-17.14 109.86,-17.14 E$34.3
S$73  (via drill 0.3 pad 0.81)
  Top 0.406: v104.27,-40.64 96.77,-40.64 arc90 96.27,-41.15 v96.27,-42.16
S$76
  Bottom 0.406: E$122.P$7 8.89,-48.9 7.62,-50.16 E$124.P$2 7.62,-52.7 8.89,-53.98 E$126.P$2
S$81
  Bottom 0.406: E$122.P$4 E$125.P$1 19.05,-41.27 E$127.P$2
S$84
  Bottom 0.406: E$136.P$2 12.7,-41.91 E$134.P$1
S$86
  Bottom 0.406: 8.26,-35.56 E$139.P$1 | 8.26,-35.56 E$135.P$1 | E$134.P$4 11.43,-38.1 | 11.43,-38.1 E$138.P$2 | 11.43,-38.1 8.26,-35.56

## Text on the board
Top: ION_PUMP_CONTROLLER_6 | A
tPlace: HV FAULT | FUSE BLOWN | FUSE | CURRENT MONITOR | EXTERNAL POWER | HV ERSET | + | +OUT | + IN | 3.0K | 7.5K | 100K | 0.1uF | 2.7K | 2.7K | 22 | + | + | U6 | 22 | + | LM392 | 2.2M | 317L | + | 300M | 49.9K | 1.87K | 5087 | 100K | 100pF | 5.11K | 237 | 5089 | 22 | + | 38.3K | 19.6K | + | 49.9K | 19.6K | + | 2N5087 | 90.9K | + | + | FD333 | 470pF | 100K | 100K | + | + | 5.11K | U9 | 4.7uF | 22 | 470pF | U6 | 5.11K | 5.11K | 5.11K | 100K | 10K | ICI7662 | + | + | 0.1uF | 22 | + | 196K | 196K | FD333 | LM392 | 100K | +11V_+15V | 1M | 470pF | 196K | 49.9K | + | 49.9K | 1.21K | 22 | + | 22 | 237 | 2.2uF | 1000pF | 5.11K | 10K | 3.16K | 385-2.5 | 50K | FD333 | 5.11K | 10K | 1.47K | 470pF | 100K | 1.87K | 2.7K | 337L | U4 | 2N5089 | 10K | 5.11K | 100K | + | EXTERNAL POWER | FD333 | + | 1.21K | 511 | 196K | 35.7K | 24.9K | 0.1uF | 5.11K | + | 10K | 22 | EXTERNAL POWER ON | 35.7K | HV FAULT | EXTERNAL RESET IN | 511 | 4040-5 | 4040-5 | FUSE BLOWN | GROUND
CONSTRUCTION: 2.550 | 2.240 | 1.910 | 1.585 | 1.110 | 0.610 | 0.775 | 3.000 | 7.800